# EAGLE board rev3.01 (EAGLE 9.2.2)
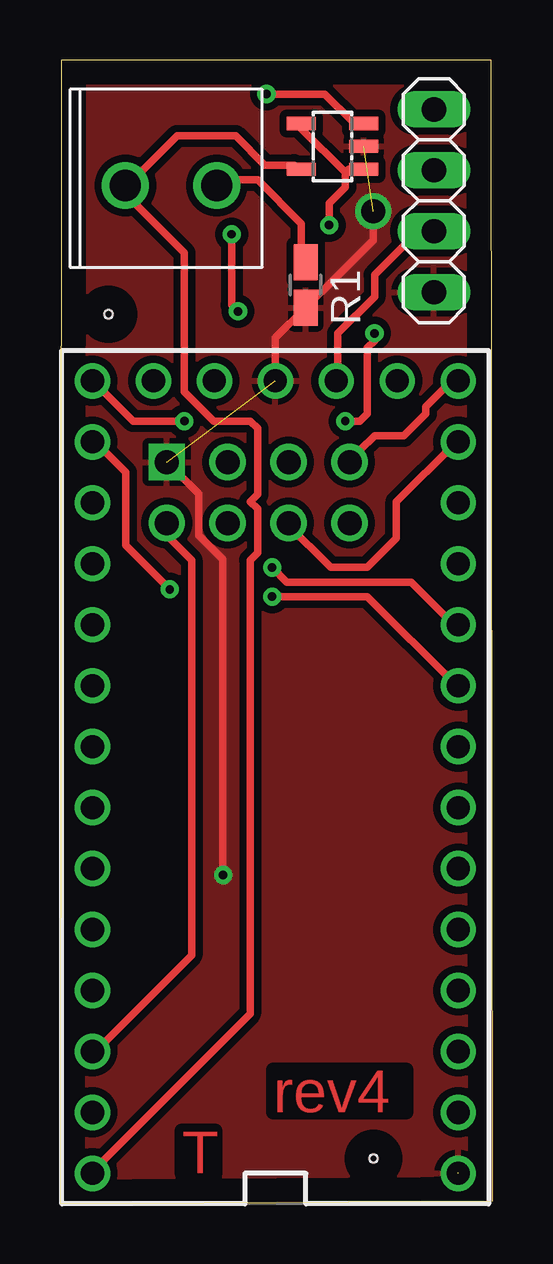
[diagram p0: board, top side]
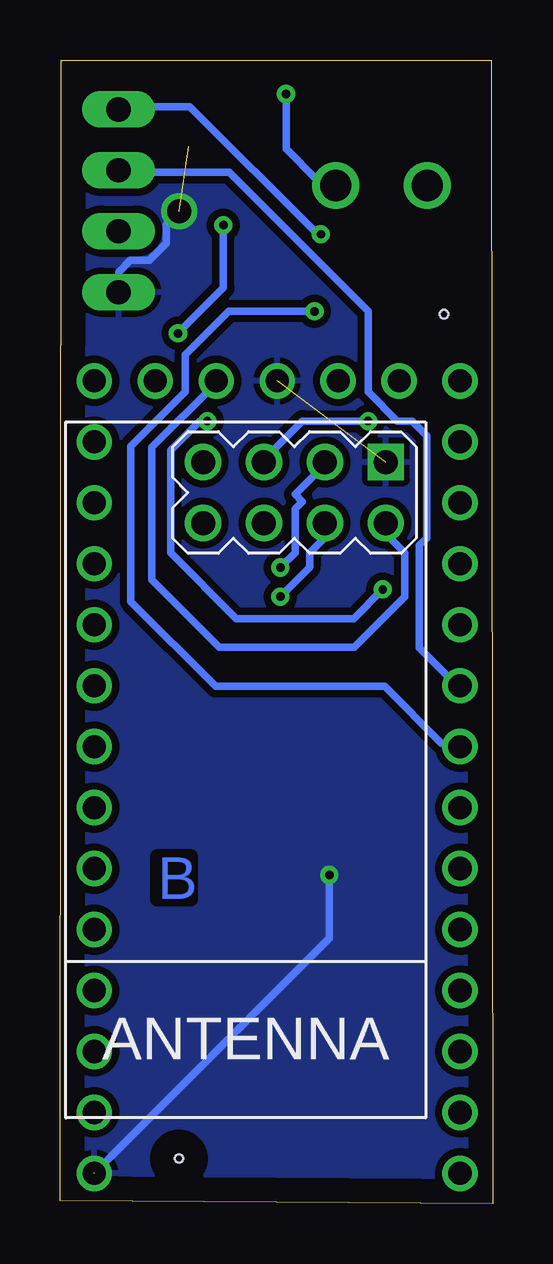
[diagram p1: board, bottom side, seen from below]

Size 18.02 x 47.66 mm. Coordinates in mm from the lower left corner, seen from the top.
Outline: 0,0 18.02,0.14 17.97,47.66 0.05,47.65 0,0
Copper layers (1*16): Top 0.035mm / dielectric 1.5mm / Bottom 0.035mm
Design rules "default": minimum track width 6mil, minimum drill 0.35mm, track to track 6mil, track to pad 6mil, pad to pad 6mil, via to via 6mil, smd to smd 6mil, copper to edge 40mil, drill to drill 6mil, minimum pad ring 10mil, minimum via ring 8mil, stop-mask expansion 4mil, vias tented up to drill 0mil, thermal gap 10mil
Net classes: 0 default: width 0.305 mm, drill 0.254 mm, clearance 0.305 mm
Holes 0.35 mm at 2.02,37.07 13.06,1.89

## Footprints (pad centres in the part's own frame; a part is rotated, then mirrored left to right if it is on the bottom)
SOT23-5L = smd 0.55 x 1.2: 1 -0.95,-1.3; 2 0,-1.3; 3 0.95,-1.3; 4 0.95,1.3; 5 -0.95,1.3
WIRELESS-NRF24L01 = drill 1 square: 1 -12.7,6.35 | drill 1: 2 -10.16,6.35; 3 -12.7,3.81; 4 -10.16,3.81; 5 -12.7,1.27; 6 -10.16,1.27; 7 -12.7,-1.27; 8 -10.16,-1.27
R0805W = smd 1.5 x 1: 1 -0.94,0; 2 0.94,0
691214310002 = drill 1.3: 1 -1.905,0; 2 1.905,0
1X04 = drill 1.016 long: 1 -3.81,0; 2 -1.27,0; 3 1.27,0; 4 3.81,0
TEENSY_3.0-3.2&LC_OUTER_ROW = drill 0.965: 0 -7.62,13.97; 1 -7.62,11.43; 2 -7.62,8.89; 3 -7.62,6.35; 3.3V 7.62,11.43; 3.3V1 -2.54,-16.51; 4 -7.62,3.81; 5 -7.62,1.27; 6 -7.62,-1.27; 7 -7.62,-3.81; 8 -7.62,-6.35; 9 -7.62,-8.89; 10 -7.62,-11.43; 11 -7.62,-13.97; 12 -7.62,-16.51; 13 7.62,-16.51; 14/A0 7.62,-13.97; 15/A1 7.62,-11.43; 16/A2 7.62,-8.89; 17/A3 7.62,-6.35; 18/A4 7.62,-3.81; 19/A5 7.62,-1.27; 20/A6 7.62,1.27; 21/A7 7.62,3.81; 22/A8 7.62,6.35; 23/A9 7.62,8.89; AGND 7.62,13.97; GND -7.62,16.51; GND1 0,-16.51; PGM 2.54,-16.51; RESET/DAC 5.08,-16.51; VBAT -5.08,-16.51; VIN 7.62,16.51

## Placement (x,y rotation side)
ADA4622-1ARZ  MCP73811/2  [SOT23-5L]  11.36,44.06 90 top
M1  WIRELESS-NRF24L01  [WIRELESS-NRF24L01]  10.79,18.21 270 bottom
R1  677K  [R0805W]  10.23,38.29 270 top
R_MES  [691214310002]  4.63,42.43 0 top
SSD1306  [1X04]  15.58,41.8 90 top
U$2  TEENSY_3.1-3.2_OUTER_ROW  [TEENSY_3.0-3.2&LC_OUTER_ROW]  8.97,17.78 180 top

## Library data of the parts
ADA4622-1ARZ R1 = adafruit
M1 = diy-modules
R_MES = TerminalBlocks (rev17a)
SSD1306 = pinhead
U$2 = Teensy_3_and_LC_Series_Boards_v1.4

## Nets
+5V: ADA4622-1ARZ.5 R_MES.1 U$2.VIN
AGND: U$2.AGND
GND: ADA4622-1ARZ.2 M1.1 R1.2 SSD1306.1 U$2.GND U$2.GND1
N$1: ADA4622-1ARZ.3 R1.1 R_MES.2
N$2: SSD1306.3 U$2.18/A4
N$3: SSD1306.4 U$2.19/A5
N$4: M1.7 U$2.12
N$5: ADA4622-1ARZ.1 ADA4622-1ARZ.4 U$2.14/A0
N$6: M1.6 U$2.11
N$7: M1.5 U$2.13
N$8: M1.4 U$2.7
N$9: M1.3 U$2.8
V+: M1.2 SSD1306.2 U$2.3.3V U$2.3.3V1
VBAT: U$2.VBAT

## Tracks (layer width: path | path; a pad name or v marks a point on that pad's centre or on a via)
+5V
  Top 0.305: ADA4622-1ARZ.5 9.75,43.28 8.53,43.28 7.32,44.5 4.88,44.5 2.74,42.37 R_MES.1 2.44,42.37 5.18,39.62 5.18,33.83 6.4,32.61 7.92,32.61 8.23,32.31 8.23,29.57 7.92,29.26 8.23,28.96 8.23,27.13 7.92,26.82 7.92,7.92 1.52,1.52 U$2.VIN
GND  (via drill 0.35, 1)  (3 unrouted)
  Top 0.305: M1.1 5.77,29.58 5.77,27.87 6.77,26.87 6.77,13.73 6.75,13.7 v6.8,13.7 | v13.05,41.35 13.05,40.14 10.92,38.02 10.9,38.02 R1.2 8.97,36.09 U$2.GND1
  Bottom 0.305: v6.8,13.7 6.8,11.06 16.57,1.29 16.59,1.29 | SSD1306.1 15.58,38.82 15.1,39.31 14.31,39.31 13.6,40.02 13.6,40.8 v13.05,41.35
  pour Top: -1.27,49.53 19.05,49.53 19.05,-1.27 -1.27,-1.27
  pour Bottom: -2.54,50.8 20.32,50.8 20.32,-2.54 -2.54,-2.54
N$1  (via drill 0.35)
  Top 0.305: v8.6,46.24 11.04,46.24 12.17,45.11 12.5,45.11 ADA4622-1ARZ.3 | R1.1 10.06,39.32 10.06,40.84 8.23,42.67 6.71,42.67 R_MES.2
  Bottom 0.305: v8.6,46.24 8.6,43.96 7.32,42.67 6.71,42.67 R_MES.2
N$2
  Bottom 0.305: U$2.18/A4 1.52,21.64 3.05,23.16 3.05,27.43 2.74,27.74 2.74,32 3.35,32.61 3.96,32.61 5.18,33.83 5.18,37.19 10.97,42.98 15.54,42.98 SSD1306.3
N$3  (via drill 0.35)
  Top 0.305: v7.15,40.4 7.15,37.45 v7.42,37.19
  Bottom 0.305: v7.42,37.19 10.99,37.19 12.8,35.38 12.8,33.83 15.06,31.57 15.06,25.09 11.53,21.56 4.49,21.56 2.13,19.2 1.52,19.2 U$2.19/A5 | v7.15,40.4 7.29,40.4 12.61,45.72 15.54,45.72 SSD1306.4
N$4
  Top 0.305: U$2.12 16.46,34.14 16.15,34.14 15.24,33.22 15.24,32.92 14.33,32 13.11,32 12.5,31.39 12.19,31.39 11.89,31.09 M1.7
N$5  (via drill 0.35)
  Top 0.305: ADA4622-1ARZ.4 10.06,44.81 11.89,42.98 | 12.5,42.98 ADA4622-1ARZ.1 12.02,43.11 11.89,42.98 | 11.89,42.98 11.89,42.37 11.21,41.69 v11.21,40.78 | v13.11,36.27 13.11,35.97 12.8,35.66 12.8,32.92 12.5,32.61 v11.89,32.61 | v4.57,25.6 2.74,27.43 2.74,30.48 1.83,31.39 1.52,31.39 1.22,31.7 U$2.14/A0
  Bottom 0.305: v11.21,40.78 11.21,38.16 v13.11,36.27 | v11.89,32.61 12.19,32.61 13.41,31.39 13.41,27.13 10.67,24.38 5.79,24.38 v4.57,25.6
N$6
  Top 0.305: U$2.11 16.46,31.7 14.02,29.26 14.02,27.74 12.8,26.52 11.28,26.52 9.45,28.35 M1.6
N$7  (via drill 0.35)
  Top 0.305: v5.18,32.61 3.05,32.61 1.52,34.14 U$2.13
  Bottom 0.305: v5.18,32.61 7.92,32.61 9.14,31.39 9.45,31.39 9.75,31.09 M1.5
N$8  (via drill 0.35)
  Top 0.305: v8.84,25.3 12.8,25.3 16.46,21.64 U$2.7
  Bottom 0.305: v8.84,25.3 7.62,26.52 7.62,27.13 7.01,27.74 7.01,28.35 M1.4
N$9  (via drill 0.35)
  Top 0.305: v8.84,26.52 9.45,25.91 14.63,25.91 16.15,24.38 16.46,24.38 U$2.8
  Bottom 0.305: v8.84,26.52 8.23,27.13 8.23,28.96 7.92,29.26 8.23,29.57 7.01,30.79 M1.3
V+
  Top 0.305: U$2.3.3V1 11.58,34.44 11.58,36.27 13.11,37.8 13.11,38.71 14.63,40.23 15.54,40.23 SSD1306.2 | U$2.3.3V 1.52,6.4 5.49,10.36 5.49,26.82 4.57,27.74 4.57,28.35 M1.2
  Bottom 0.305: U$2.3.3V1 11.58,34.14 14.2,31.52 14.2,26.01 11.38,23.19 5.77,23.19 3.66,25.3 3.66,27.13 4.27,27.74 4.27,28.35 M1.2

## Text on the board
Top: rev4 | T
Bottom: B